# Altium PCB USB-B-Female-90.pcbdoc
Units mil, origin at the board's own origin, x right, y up, seen from the top; angles counter-clockwise.
Board outline 1096.1 x 1149.6 mil, 2 copper layers (Top Layer, Bottom Layer), stack 0 mil thick; 1 components, 0 nets, 6 pads, 0 vias.
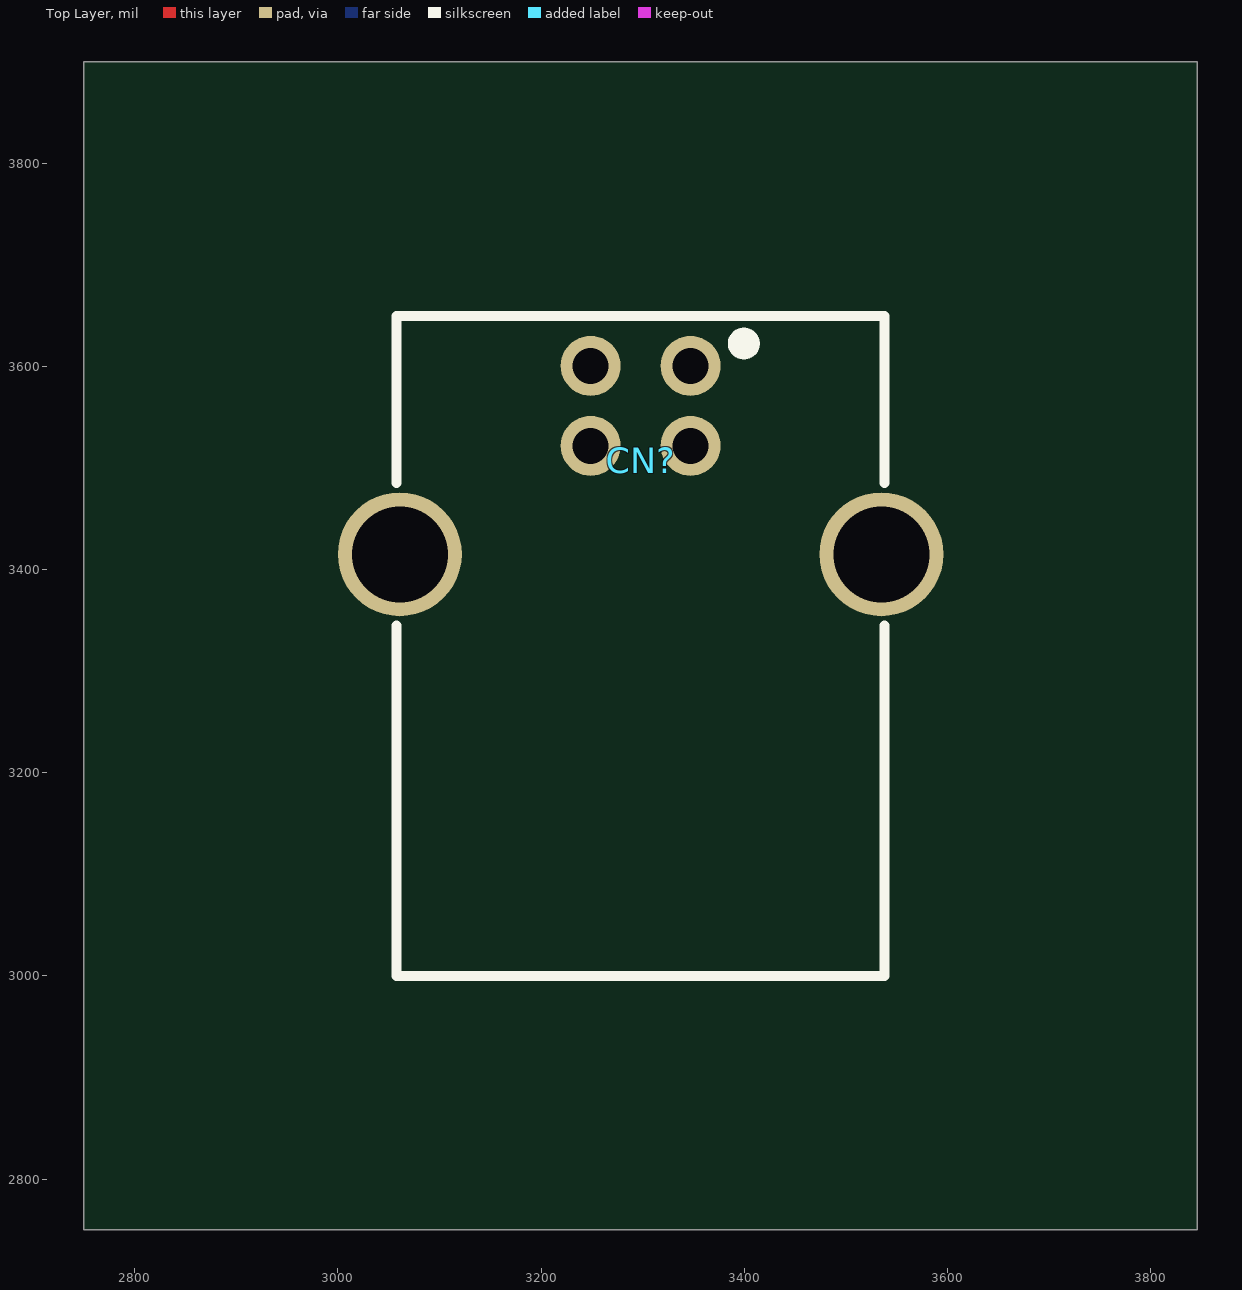
[diagram p0: Top Layer view]
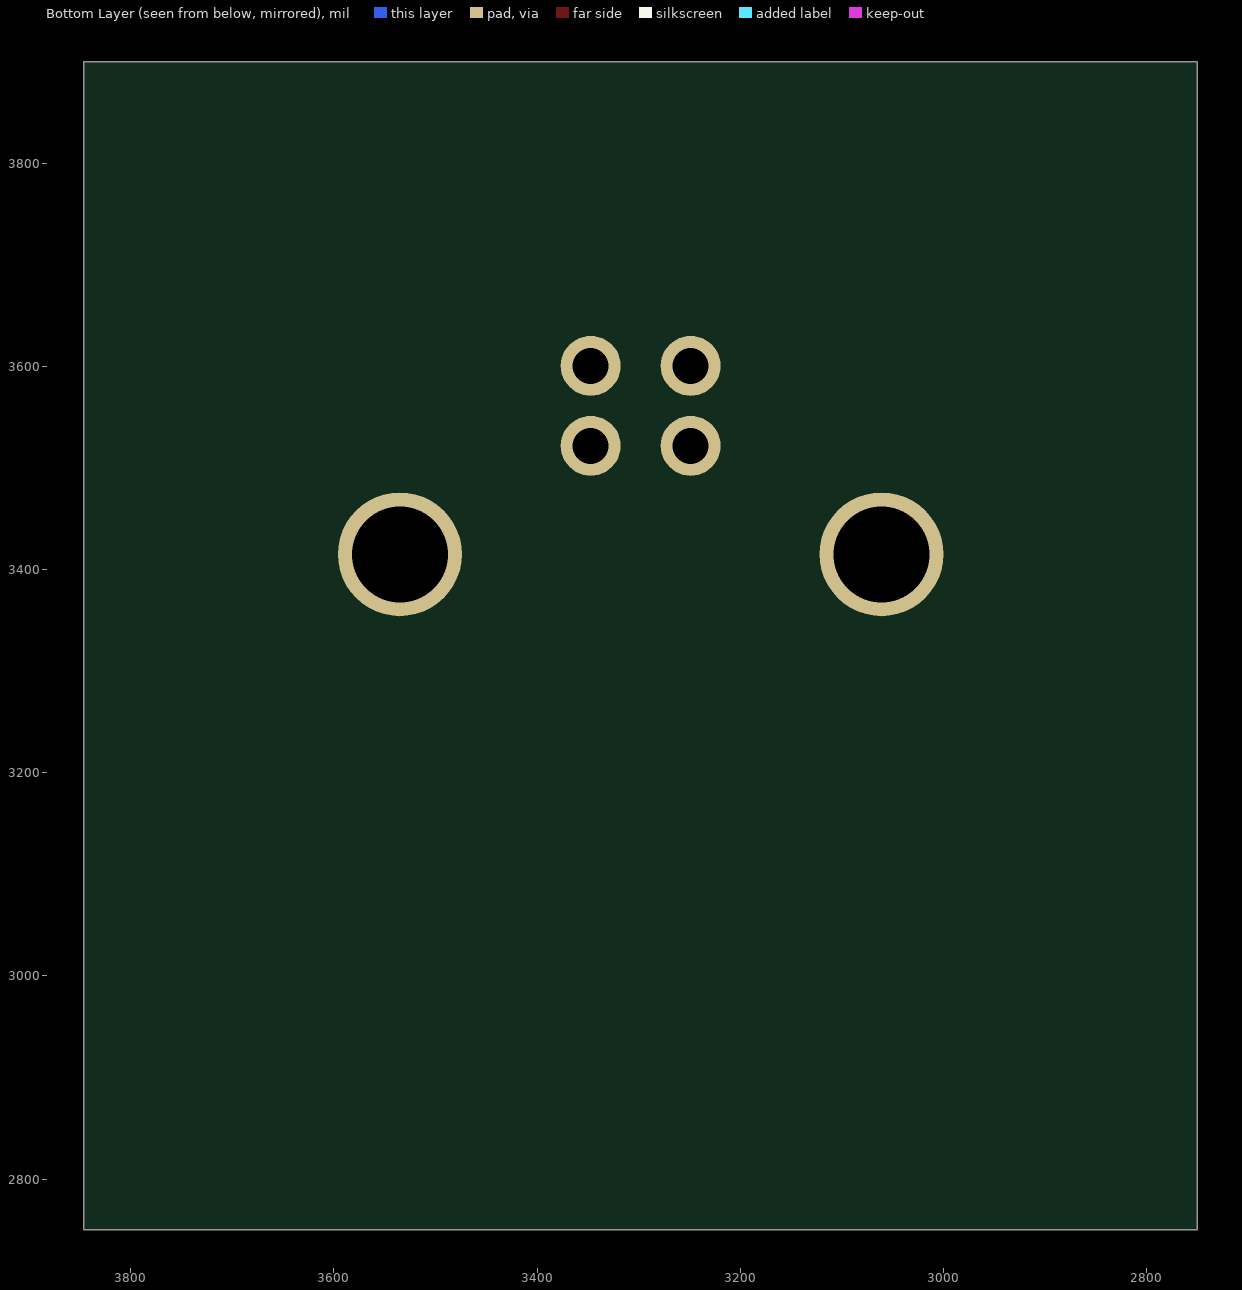
[diagram p1: Bottom Layer view, seen from below]

## Layer stack, top to bottom
Top Layer: signal copper (thickness not stored)
Bottom Layer: signal copper (thickness not stored)

## Board outline
3846.1,2750 2750,2750 2750,3899.6 3846.1,3899.6

## Components (designator, comment, footprint, x,y, rotation, side; value= is the part's Value field where it differs from the comment)
CN? "921-111A1010D10200" USB-B_TH_USB-B-FEMALE-90 3298,3507.7 r0 top

## Footprints (in the part's own frame and the unit in brackets; to place one, negate y for a bottom-side part, rotate by r counter-clockwise, add the part's x,y. Pads: shape width x height; smd on the part's side, far side on the other; paste and mask are expansions set on the pad)
USB-B_TH_USB-B-FEMALE-90 [mil]
  round 59.1 hole 35.4: 1(49.2,92.7) 2(-49.2,92.7) 3(-49.2,14) 4(49.2,14)
  round 122 hole 94.5: 5(-237,-92.8) 6(237,-92.8)
  silkscreen extent -240,-508 240,142

## Nets (pads, with @x,y where several pads share a name; then routed paths per layer and width w, separated by ;. In a path a pad name is that pad's centre, name@x,y a point inside that pad or via, vN(x,y) a via of type N, cw(c..) or ccw(c..) an arc to the next point about the centre after c; other vN are vias at no path point)
pads on no net: CN?.1 CN?.2 CN?.3 CN?.4 CN?.5 CN?.6